# Altium PCB MotionDetectProgJigPCB.PcbDoc
Units mil, origin at the board's own origin, x right, y up, seen from the top; angles counter-clockwise.
Board outline 2000 x 1000 mil, 2 copper layers (Top Layer, Bottom Layer); 15 components, 12 nets, 55 pads, 9 vias.
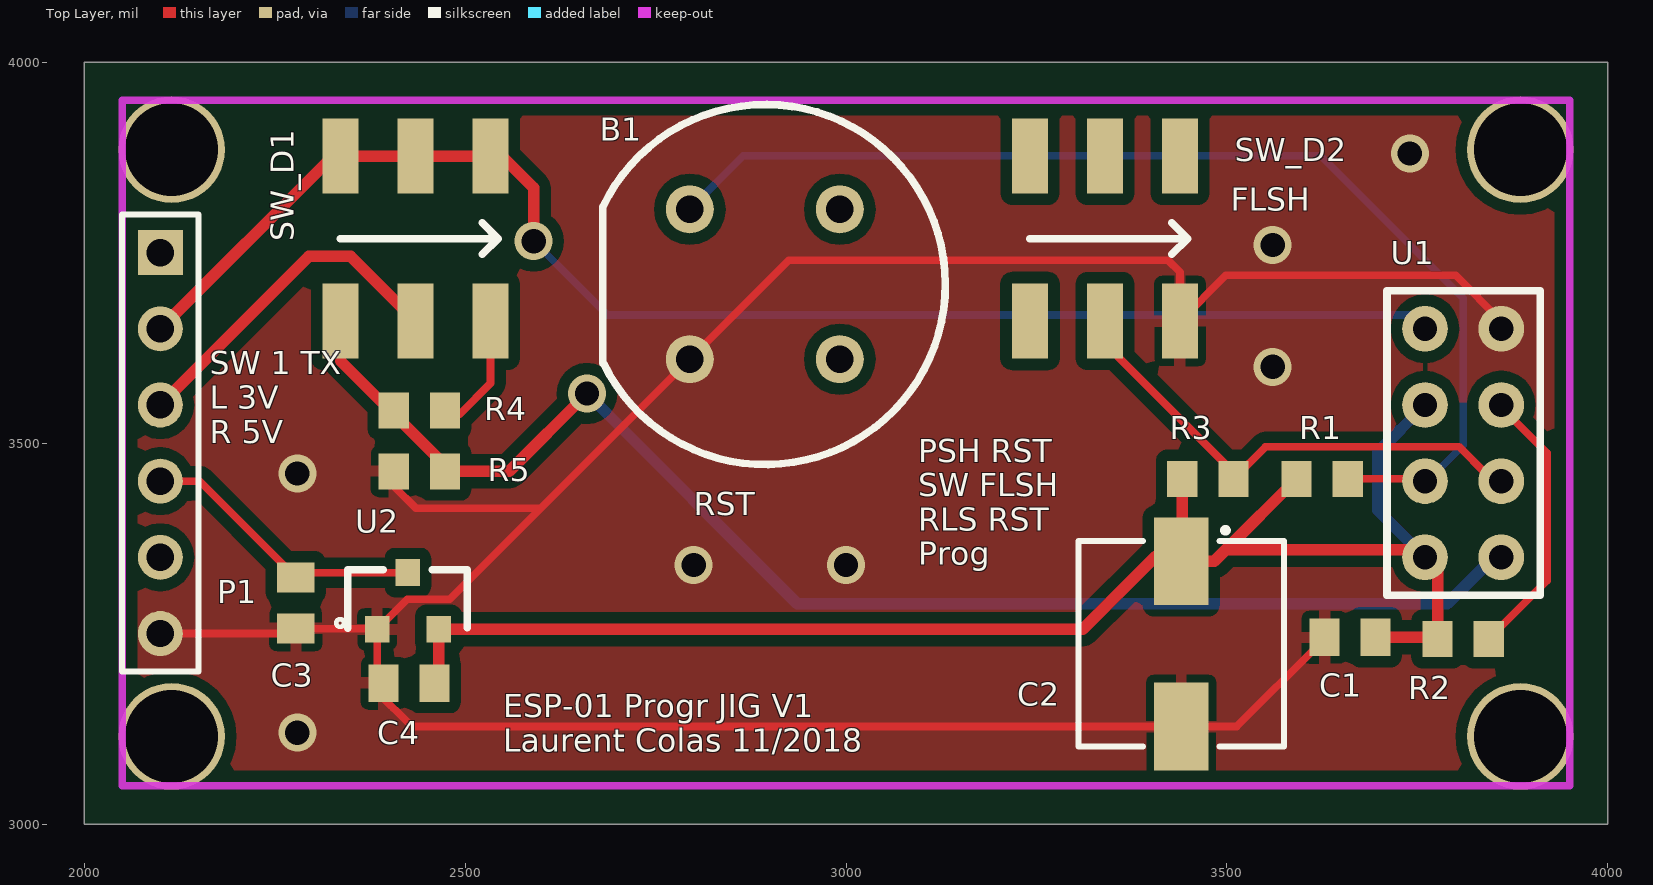
[diagram p0: Top Layer view]
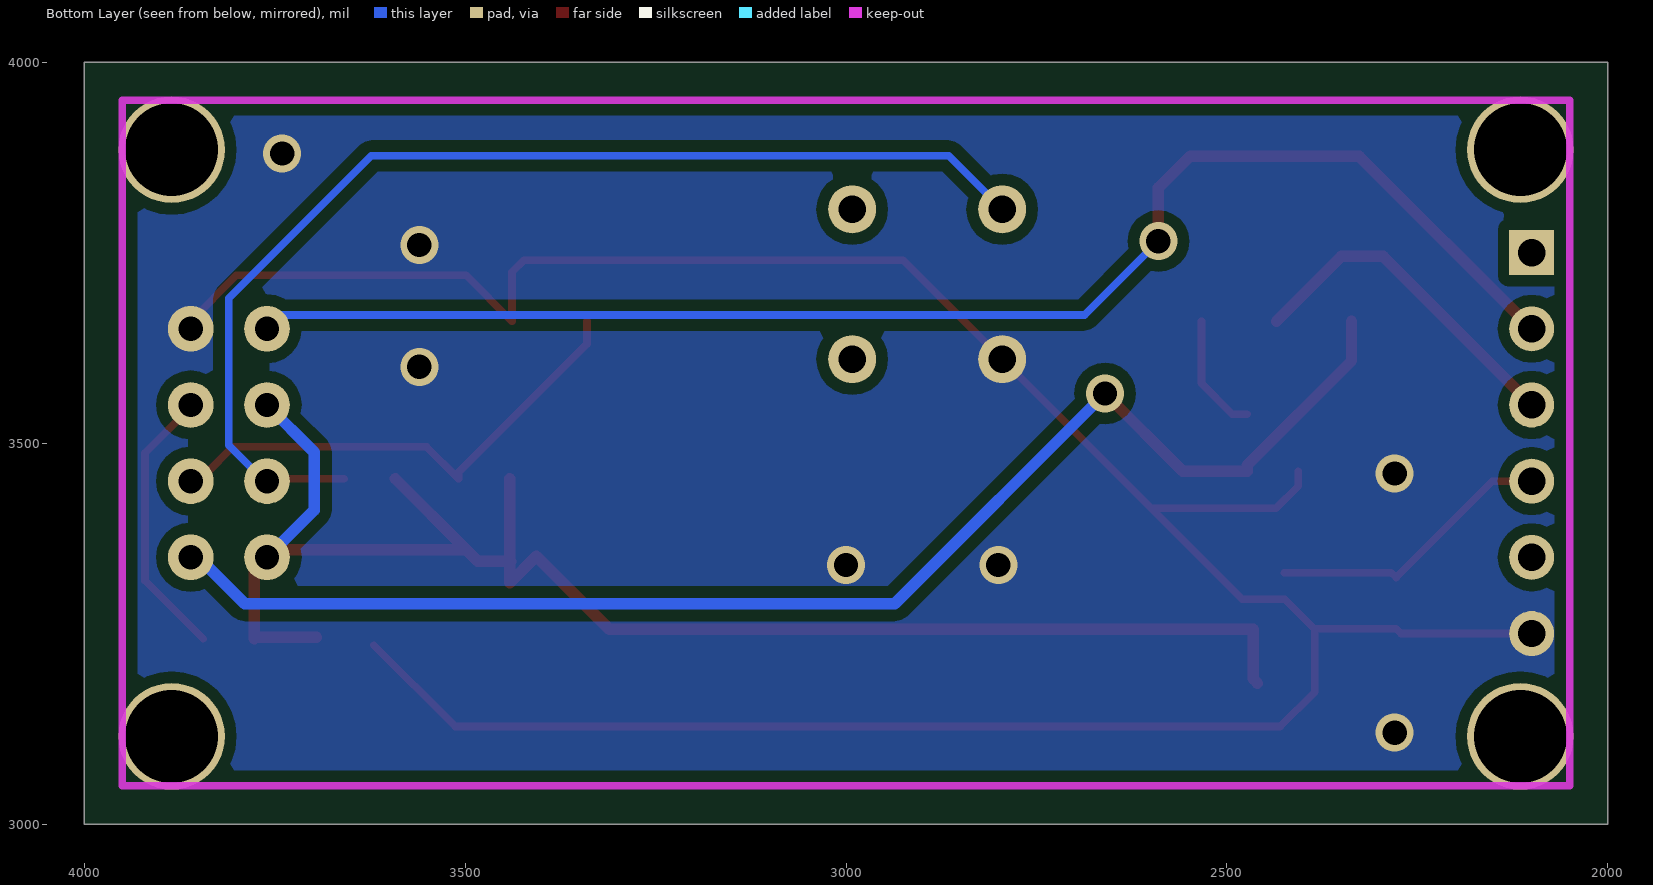
[diagram p1: Bottom Layer view, seen from below]

## Layer stack, top to bottom
Top Solder: solder mask 0.4, Solder Resist, Dk 3.5
Top Layer: signal copper 1.4
Dielectric 1: dielectric 12.6, FR-4, Dk 4.8
Bottom Layer: signal copper 1.4
Bottom Solder: solder mask 0.4, Solder Resist, Dk 3.5

## Board outline
2000,3000 4000,3000 4000,4000 2000,4000

## Design rules (kind name [scope] priority, off if disabled: settings)
Clearance Clearance_4 [InNamedPolygon('AutoNaming2')] p1: gap=15 ignorepadtopadclearanceinfootprint=FALSE
Clearance Clearance_3 [InNamedPolygon('GND_L01_P004')] p2: gap=15 ignorepadtopadclearanceinfootprint=FALSE
Clearance Clearance_2 [InNamedPolygon('botlayer')] p3: gap=20 ignorepadtopadclearanceinfootprint=FALSE
Clearance Clearance_1 [InNamedPolygon('Top Layer-No Net')] p4: gap=15 ignorepadtopadclearanceinfootprint=FALSE
Clearance [All] p5: gap=10 ignorepadtopadclearanceinfootprint=FALSE
HoleSize [All] p1: absolutevalues=TRUE maxlimit=200 minlimit=1 maxpercent=80.000 minpercent=20.000
PolygonConnect PolygonConnect_4 [All vs IsNamedPolygon('AutoNaming2')] p1: thpad.connectstyle=Direct thpad.reliefconductorwidth=10 thpad.reliefentries=4 thpad.polygonreliefangle="90 Angle" thpad.airgapwidth=10 smdpad.connectstyle=Relief smdpad.reliefconductorwidth=15 smdpad.reliefentries=4 smdpad.polygonreliefangle="90 Angle" smdpad.airgapwidth=10 via.connectstyle=Direct via.reliefconductorwidth=10 via.reliefentries=4 via.polygonreliefangle="90 Angle" via.airgapwidth=10
PolygonConnect PolygonConnect_3 [All vs IsNamedPolygon('GND_L01_P004')] p2: thpad.connectstyle=Direct thpad.reliefconductorwidth=10 thpad.reliefentries=4 thpad.polygonreliefangle="90 Angle" thpad.airgapwidth=10 smdpad.connectstyle=Relief smdpad.reliefconductorwidth=15 smdpad.reliefentries=4 smdpad.polygonreliefangle="90 Angle" smdpad.airgapwidth=10 via.connectstyle=Direct via.reliefconductorwidth=10 via.reliefentries=4 via.polygonreliefangle="90 Angle" via.airgapwidth=10
PolygonConnect PolygonConnect_2 [All vs IsNamedPolygon('botlayer')] p3: thpad.connectstyle=Direct thpad.reliefconductorwidth=10 thpad.reliefentries=4 thpad.polygonreliefangle="90 Angle" thpad.airgapwidth=10 smdpad.connectstyle=Relief smdpad.reliefconductorwidth=15 smdpad.reliefentries=4 smdpad.polygonreliefangle="90 Angle" smdpad.airgapwidth=10 via.connectstyle=Direct via.reliefconductorwidth=10 via.reliefentries=4 via.polygonreliefangle="90 Angle" via.airgapwidth=10
PolygonConnect PolygonConnect_1 [All vs IsNamedPolygon('Top Layer-No Net')] p4: thpad.connectstyle=Direct thpad.reliefconductorwidth=20 thpad.reliefentries=4 thpad.polygonreliefangle="90 Angle" thpad.airgapwidth=10 smdpad.connectstyle=Relief smdpad.reliefconductorwidth=20 smdpad.reliefentries=4 smdpad.polygonreliefangle="90 Angle" smdpad.airgapwidth=10 via.connectstyle=Direct via.reliefconductorwidth=10 via.reliefentries=4 via.polygonreliefangle="90 Angle" via.airgapwidth=10
PolygonConnect [All] p5: connectstyle=Relief reliefconductorwidth=10 reliefentries=4 polygonreliefangle="90 Angle" airgapwidth=10
RoutingVias [All] p1: holewidth=25 width=40 viastyle="Through Hole" minholewidth=28 minwidth=50 maxholewidth=28 maxwidth=50
SolderMaskExpansion [All] p1: expansion=4
Width [All] p1: maxlimit=20 minlimit=10 preferedwidth=10
29 further rules are at their usual default settings.

## Components (designator, comment, footprint, x,y, rotation, side; value= is the part's Value field where it differs from the comment)
B1 "Button_D6R90" BUTTON_D6R90 2796.97,3806.85 r0 top
C1 "Cap" CAP_0804 3661.43,3242.05 r180 top value=1uF
C2 "Cap Pol1" U2-K 3440,3236.5 r270 top value=220uF
C3 "Cap" CAP_0804 2275,3290 r90 top value=1uF
C4 "Cap" CAP_0804 2426.43,3187.95 r0 top value=1uF
P1 "Header 6" HDR1X6 2100,3750 r270 top
R1 "Res1" RES_0804_PANASONIC 3625,3450 r180 top value=10k
R2 "Res1" RES_0804_PANASONIC 3810,3240 r180 top value=10k
R3 "Res1" RES_0804_PANASONIC 3475,3450 r180 top value=10k
R4 "Res1" RES_0804_PANASONIC 2440,3540 r180 top value=10k
R5 "Res1" RES_0804_PANASONIC 2440,3460 r180 top value=20k
SW_D1 "SW_DPDT" SW_DPDT 2336.57,3660 r0 top
SW_D2 "SW_DPDT" SW_DPDT 3241.57,3660 r0 top
U1 "ESP-01" ESP-01 3710,3500 r0 top
U2 "Voltage Reg" SOT-23 2425,3292.8 r0 top value=Value

## Footprints (in the part's own frame and the unit in brackets; to place one, negate y for a bottom-side part, rotate by r counter-clockwise, add the part's x,y. Pads: shape width x height; smd on the part's side, far side on the other; paste and mask are expansions set on the pad)
BUTTON_D6R90 [mm]
  round 1.6 hole 0.914: 1(-0.05,0) 2(4.95,0) 3(-0.05,-5) 4(4.95,-5)
  silkscreen extent -2.95,-8.51 8.47,3.49
CAP_0804 [mm]
  rect 1.006x1.25 smd: 1(-0.853,-0.075) 2(0.853,-0.075)
ESP-01 [mil]
  round 60 hole 32: 1(50,150) 2(150,150) 3(50,50) 4(150,50) 5(50,-50) 6(150,-50) 7(50,-150) 8(150,-150)
  silkscreen extent 0,-200 201,200
HDR1X6 [mm] "Connector; Header; 6 Position"
  rect 1.5x1.5 hole 0.914: 1(0,0)
  round 1.5 hole 0.914: 2(2.54,0) 3(5.08,0) 4(7.62,0) 5(10.16,0) 6(12.7,0)
  silkscreen extent -1.27,-1.27 13.97,1.27
RES_0804_PANASONIC [mm]
  rect 1.006x1.2 smd: 1(-0.853,-0.075) 2(0.853,-0.075)
SOT-23 [mil]
  rect 32x35 smd paste+0: 1(-40.35,-37.2) 2(40.35,-37.2) 3(0,37.2)
  silkscreen extent -94,-36 78,41
SW_DPDT [mm]
  rect 1.2x2.5 smd: 1(0,0) 2(2.5,0) 3(5,0) 4(0,5.5) 5(2.5,5.5) 6(5,5.5)
  silkscreen extent 0,2.22 5.25,3.27
U2-K [mil]
  rect 115x72 smd paste+0 mask+0: 1(-108.5,0) 2(108.5,0)
  silkscreen extent -152,-135 135,135

## Part data
C1 C3 C4: "Capacitor", LatestRevisionDate=17-Jul-2002, LatestRevisionNote="Re-released for DXP Platform.", PackageDescription="Radial Cap, Thru-Hole; 2 Leads; 0.3 in Pin Spacing", PackageReference=RAD-0.3, Published=8-Jun-2000, Publisher="Altium Limited"
C2: "Polarized Capacitor (Radial)", LatestRevisionDate=17-Jul-2002, LatestRevisionNote="Re-released for DXP Platform.", PackageDescription="Polarized Capacitor (Radial); 2 Leads", PackageReference=RB7.6-15, Published=8-Jun-2000, Publisher="Altium Limited"
P1: "Header, 6-Pin", LatestRevisionDate=17-Jul-2002, LatestRevisionNote="Re-released for DXP Platform.", Publisher="Altium Limited"
R1 R2 R3 R4 R5: "Resistor", LatestRevisionDate=17-Jul-2002, LatestRevisionNote="Re-released for DXP Platform.", PackageDescription="Axial Device, Thru-Hole; 2 Leads; 0.3 in Pin Spacing", PackageReference=AXIAL-0.3, Published=8-Jun-2000, Publisher="Altium Limited"
U2: library part AP2120N-3.3TRG1, Built_By=EMA_UL_Team, Manufacturer_Part_Number=AP2120N-3.3TRG1, RefDes=RefDes, Type=DEV, Vendor="Diodes Inc"

## Free pads (board coordinates)
  round 140 hole 122: ""(2115,3115) ""(2115,3885) ""(3885,3115) ""(3885,3885)

## Via types
v1: diameter 50, hole 32, Top Layer to Bottom Layer, 9 vias

## Nets (pads, with @x,y where several pads share a name; then routed paths per layer and width w, separated by ;. In a path a pad name is that pad's centre, name@x,y a point inside that pad or via, vN(x,y) a via of type N, cw(c..) or ccw(c..) an arc to the next point about the centre after c; other vN are vias at no path point)
+5V: C3.2 P1.4 U2.3 | length 380
  Top Layer w10: P1.4 2151.53,3450 C3.2 2284.38,3330 U2.3
CTS#: P1.5
GND: B1.3 C1.2 C2.2 C3.1 C4.1 P1.6 R5.2 SW_D2.3 U1.2 U2.1 | length 3688.9
  Top Layer w10: P1.6 2271.53,3250 C3.1 2383.81,3256.43 U2.1 ; R5.2 2406.43,3443.57 2435.62,3414.38 2599.38,3414.38 ; C1.2@3619.69,3234.69 3513,3128 C2.2 2429.85,3128 2385,3172.85 2385,3255.24 U2.1 ; U1.2@3860,3660 3800,3720 3498.43,3720 SW_D2.3 3438.43,3724.21 3422.64,3740 2925,3740 B1.3 2599.38,3414.38 ; U2.1 2424.06,3295 2480,3295 2599.38,3414.38
  other v1: 2280,3120 2800,3340 3000,3340 2280,3460 3560,3600 3560,3760 3740,3880
IO0: R3.1 SW_D2.2 U1.6 | length 660.2
  Top Layer w10: SW_D2.2 3340,3630 3508.57,3461.43 R3.1 3550.62,3495 3805,3495 3840,3460 U1.6@3860,3460
IO2: R2.1 U1.4 | length 373.6
  Top Layer w10: R2.1 3920,3319.38 3920,3487 3860,3547 U1.4 U1.4@3860,3560
NetR4_1: R4.1 SW_D1.3 | length 158.2
  Top Layer w10: R4.1@2473.57,3537.95 2492.95,3537.95 2533.43,3578.43 SW_D1.3
RST: B1.1 R1.1 U1.5 | length 1484.1
  Top Layer w10: R1.1 3752.95,3452.95 U1.5@3760,3460
  Bottom Layer w10: B1.1 2865,3876.85 3623.15,3876.85 3810,3690 3810,3497 3773,3460 U1.5@3760,3460
RTS#: P1.1
RX: P1.2 SW_D1.4 SW_D1.5 SW_D1.6 U1.1 | length 1905.8
  Top Layer w15: P1.2 2326.54,3876.54 SW_D1.4 SW_D1.5 SW_D1.6 2548.46,3876.54 2590,3835 2590,3780.04 2605.04,3765 v1(2590,3765)
  Bottom Layer w10: v1(2590,3765) 2687,3668 3752,3668 U1.1@3760,3660
TX: P1.3 SW_D1.2 | length 451
  Top Layer w15: P1.3 2295,3745 2350,3745 SW_D1.2
TX_3V: R4.2 R5.1 SW_D1.1 U1.8 | length 1826.2
  Top Layer w15: SW_D1.1 2336.57,3607.8 2473.57,3470.8 R5.1 2557.95,3462.95 v1(2660,3565)
  Bottom Layer w15: v1(2660,3565) 2936,3289 3789,3289 U1.8@3860,3360
VCC: C1.1 C2.1 C4.2 R1.2 R2.2 R3.2 U1.3 U1.7 U2.2 | length 2148.3
  Top Layer w15: C4.2 2465.35,3190.35 U2.2 3310.59,3255.59 3406.43,3351.43 3441.43,3316.43 C2.1@3441.43,3345 ; C2.1 C2.1@3441.43,3345 ; C2.1@3441.43,3351.43 R3.2 ; R1.2 3498.47,3360 ; C1.1 3774.38,3245 R2.2 3776.43,3333.57 U1.7 3760,3360 3498.47,3360 ; C2.1@3441.43,3345 3483.47,3345 3498.47,3360
  Bottom Layer w15: U1.7 3698,3412 3698,3488 U1.3
pads on no net: B1.2 B1.4 SW_D2.1 SW_D2.4 SW_D2.5 SW_D2.6

## Polygon pours and split planes (outlines as drawn)
GND on Top Layer "GND_L01_P004" (solid, remove dead copper, pour order 4): 2000,4000 4000,4000 4000,3000 2000,3000
GND on Bottom Layer "AutoNaming2" (solid, remove dead copper, pour order 6): 2000,4000 4000,4000 4000,3000 2000,3000

## Keep-outs
Keep-Out Layer:
  lines w10: 2050,3050 2050,3950 3950,3950 3950,3050 2050,3050

## Silkscreen, mask and mechanical layers (free items; w line width, h text height)
Top Overlay:
  text "FLSH" at 3505,3805 h30
  text "SW 1 TX / L 3V / R 5V" at 2165,3500 h30
  text "RST" at 2800,3405 h30
  text "PSH RST / SW FLSH / RLS RST / Prog" at 3095,3340 h30
  text "ESP-01 Progr JIG V1 / Laurent Colas 11/2018" at 2550,3095 h30
Mechanical 1:
  the board outline again, w10